# Altium PCB JTAG_XILINX.PcbDoc (part 2 of 2)
Units mm, origin at the board's own origin, x right, y up, seen from the top; angles counter-clockwise.
Board outline 27.94 x 27.94 mm, 4 copper layers (Top Layer, GND, PWR, Bottom Layer), stack 0.603 mm thick; 44 components, 49 nets, 1237 pads, 94 vias.
Unrouted connection lines stored in the file: 218.
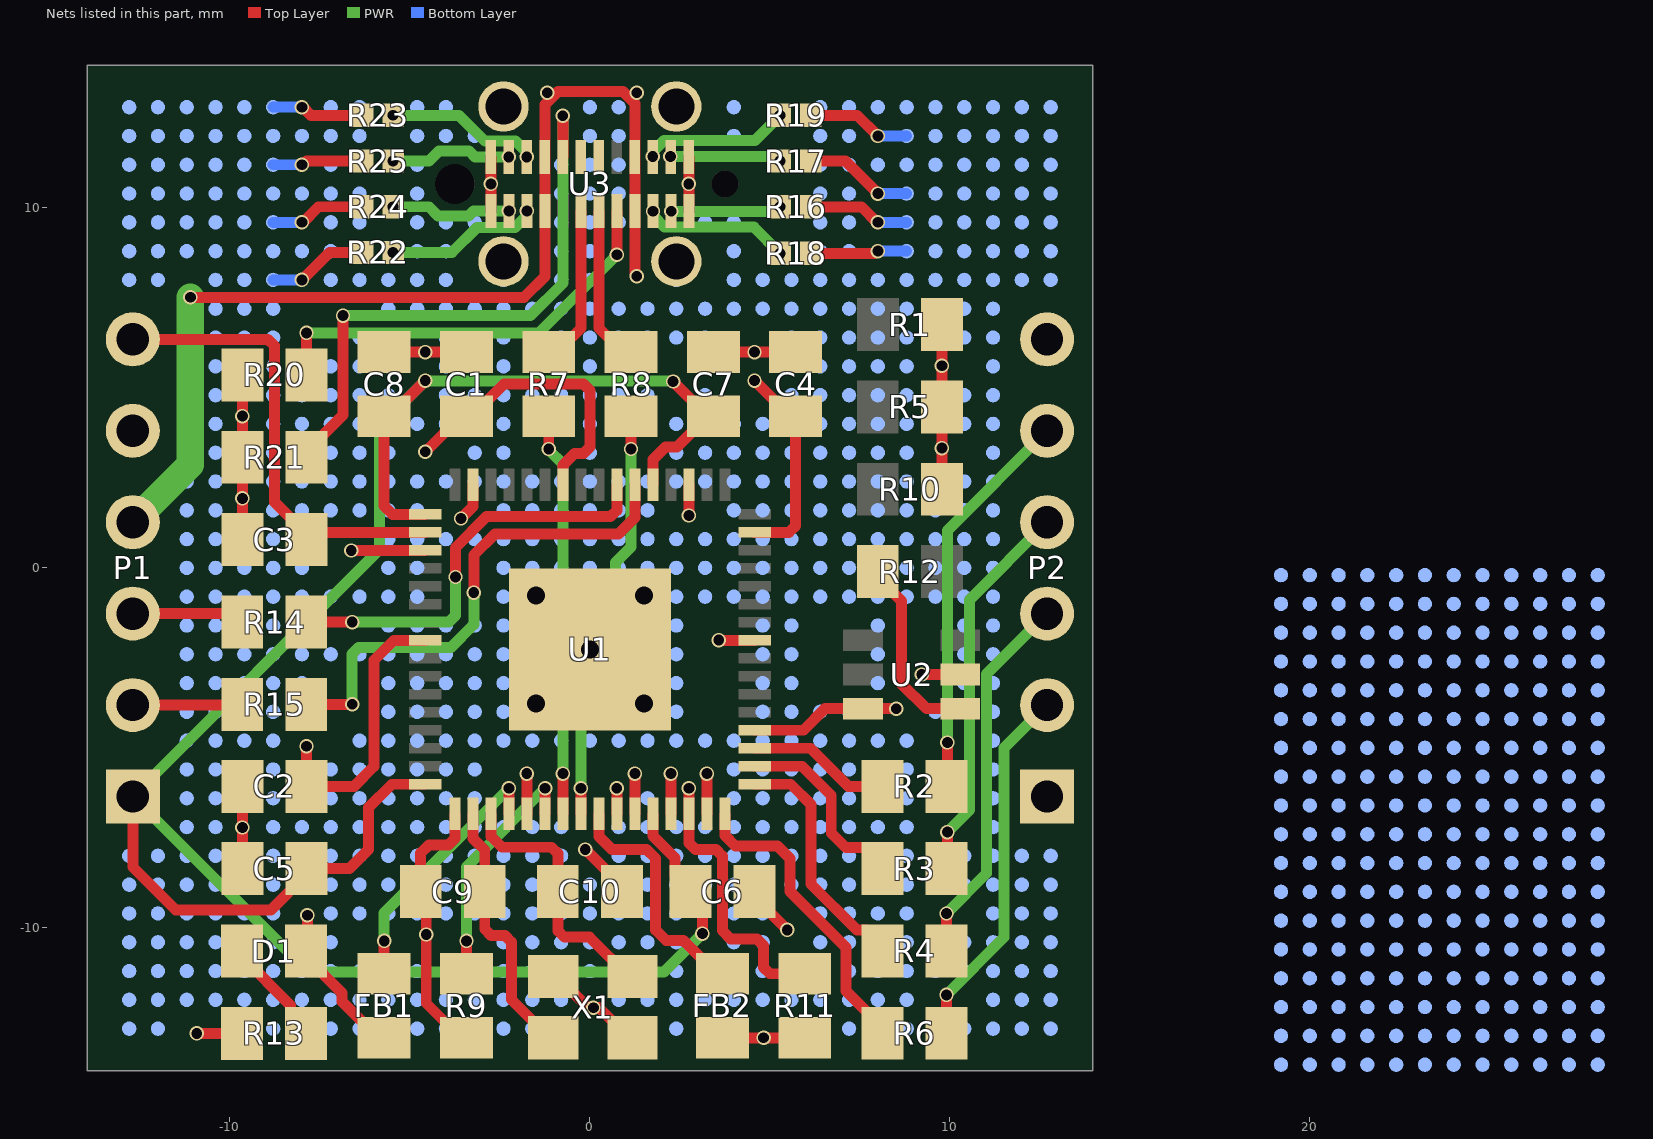
[diagram p4: the nets of this part, all layers, seen from the top]

## Via types
v1: diameter 0.4, hole 0.3, Top Layer to Bottom Layer, 89 vias
v2: diameter 0.7, hole 0.5, Top Layer to Bottom Layer, 5 vias

## Nets (pads, with @x,y where several pads share a name; then routed paths per layer and width w, separated by ;. In a path a pad name is that pad's centre, name@x,y a point inside that pad or via, vN(x,y) a via of type N, cw(c..) or ccw(c..) an arc to the next point about the centre after c; other vN are vias at no path point) (continued)
GND: C1.1 C2.1 C3.1 C4.1 C5.1 C6.1 C7.1 C8.1 C9.1 C10.1 P1.5 P2.1 pad.2@0,0 pad.2@0,0.8 pad.2@0,1.6 pad.2@0,2.4 pad.2@0,3.2 pad.2@0,4 pad.2@0,4.8 pad.2@0,5.6 pad.2@0,6.4 pad.2@0,7.2 pad.2@0,-0.8 pad.2@0,-1.6 pad.2@0,-2.261 pad.2@0,-3.2 pad.2@0,-4 pad.2@0,-4.8 pad.2@0,-8.8 pad.2@0,-9.6 pad.2@0,-10.4 pad.2@0,-11.2 pad.2@0.8,0 pad.2@0.8,0.8 pad.2@0.8,1.6 pad.2@0.8,2.4 pad.2@0.8,4 pad.2@0.8,4.8 pad.2@0.8,5.6 pad.2@0.8,6.4 pad.2@0.8,7.2 pad.2@0.8,-0.8 pad.2@0.8,-1.6 pad.2@0.8,-2.4 pad.2@0.8,-3.2 pad.2@0.8,-4 pad.2@0.8,-4.8 pad.2@0.8,-7.2 pad.2@0.8,-8 pad.2@0.8,-8.8 pad.2@0.8,-9.6 pad.2@0.8,-10.4 pad.2@0.8,-11.2 pad.2@0.8,-12 pad.2@0.8,-12.8 pad.2@1.6,0 pad.2@1.6,0.8 pad.2@1.6,1.6 pad.2@1.6,2.4 pad.2@1.6,4 pad.2@1.6,4.8 pad.2@1.6,5.6 pad.2@1.6,6.4 pad.2@1.6,7.2 pad.2@1.6,-0.8 pad.2@1.6,-1.6 pad.2@1.6,-2.4 pad.2@1.6,-4.8 pad.2@1.6,-6.4 pad.2@1.6,-7.2 pad.2@1.6,-8 pad.2@1.6,-8.8 pad.2@1.6,-9.6 pad.2@1.6,-10.4 pad.2@1.6,-11.2 pad.2@1.6,-12 pad.2@1.6,-12.8 pad.2@2.4,0 pad.2@2.4,0.8 pad.2@2.4,2.4 pad.2@2.4,3.2 pad.2@2.4,4 pad.2@2.4,6.4 pad.2@2.4,7.2 pad.2@2.4,8 pad.2@2.4,8.8 pad.2@2.4,-0.8 pad.2@2.4,-1.6 pad.2@2.4,-2.4 pad.2@2.4,-3.2 pad.2@2.4,-4 pad.2@2.4,-4.8 pad.2@2.4,-7.2 pad.2@2.4,-8 pad.2@2.4,-8.8 pad.2@2.4,-9.6 pad.2@2.4,-10.4 pad.2@2.4,-11.2 pad.2@2.4,-12 pad.2@2.4,-12.8 pad.2@3.2,0 pad.2@3.2,0.8 pad.2@3.2,2.4 pad.2@3.2,3.2 pad.2@3.2,4 pad.2@3.2,4.8 pad.2@3.2,5.6 pad.2@3.2,6.4 pad.2@3.2,7.2 pad.2@3.2,9.6 pad.2@3.2,-0.8 pad.2@3.2,-4.8 pad.2@3.2,-7.2 pad.2@3.2,-8 pad.2@3.2,-8.8 pad.2@3.2,-11.2 pad.2@3.2,-12 pad.2@3.2,-12.8 pad.2@4,0 pad.2@4,0.8 pad.2@4,1.6 pad.2@4,2.4 pad.2@4,3.2 pad.2@4,4 pad.2@4,7.2 pad.2@4,8 pad.2@4,8.8 pad.2@4,9.6 pad.2@4,12 pad.2@4,12.8 pad.2@4,-0.8 pad.2@4,-4.8 pad.2@4,-5.6 pad.2@4,-6.4 pad.2@4,-7.2 pad.2@4,-8 pad.2@4,-8.8 pad.2@4,-9.6 pad.2@4,-10.4 pad.2@4,-11.2 pad.2@4,-12 pad.2@4,-12.8 pad.2@4.8,0 pad.2@4.8,0.8 pad.2@4.8,1.6 pad.2@4.8,2.4 pad.2@4.8,3.2 pad.2@4.8,4 pad.2@4.8,7.2 pad.2@4.8,8 pad.2@4.8,-0.8 pad.2@4.8,-1.6 pad.2@4.8,-2.4 pad.2@4.8,-3.2 pad.2@4.8,-4 pad.2@4.8,-4.8 pad.2@4.8,-5.6 pad.2@4.8,-6.4 pad.2@4.8,-7.2 pad.2@4.8,-8 pad.2@4.8,-8.8 pad.2@4.8,-9.6 pad.2@4.8,-10.4 pad.2@4.8,-11.2 pad.2@4.8,-12 pad.2@5.6,0 pad.2@5.6,0.8 pad.2@5.6,1.6 pad.2@5.6,2.4 pad.2@5.6,3.2 pad.2@5.6,4 pad.2@5.6,4.8 pad.2@5.6,5.6 pad.2@5.6,6.4 pad.2@5.6,7.2 pad.2@5.6,8 pad.2@5.6,-0.8 pad.2@5.6,-1.6 pad.2@5.6,-2.4 pad.2@5.6,-3.2 pad.2@5.6,-4 pad.2@5.6,-4.8 pad.2@5.6,-5.6 pad.2@5.6,-6.4 pad.2@5.6,-7.2 pad.2@5.6,-8 pad.2@5.6,-8.8 pad.2@5.6,-11.2 pad.2@5.6,-12 pad.2@5.6,-12.8 pad.2@6.4,0 pad.2@6.4,0.8 pad.2@6.4,1.6 pad.2@6.4,2.4 pad.2@6.4,3.2 pad.2@6.4,4 pad.2@6.4,4.8 pad.2@6.4,5.6 pad.2@6.4,6.4 pad.2@6.4,7.2 pad.2@6.4,8 pad.2@6.4,8.8 pad.2@6.4,9.6 pad.2@6.4,10.4 pad.2@6.4,11.2 pad.2@6.4,12 pad.2@6.4,12.8 pad.2@6.4,-0.8 pad.2@6.4,-4 pad.2@6.4,-4.8 pad.2@6.4,-5.6 pad.2@6.4,-6.4 pad.2@6.4,-7.2 pad.2@6.4,-8 pad.2@6.4,-8.8 pad.2@6.4,-9.6 pad.2@6.4,-10.4 pad.2@6.4,-11.2 pad.2@6.4,-12 pad.2@6.4,-12.8 pad.2@7.2,0 pad.2@7.2,0.8 pad.2@7.2,1.6 pad.2@7.2,2.4 pad.2@7.2,3.2 pad.2@7.2,4 pad.2@7.2,4.8 pad.2@7.2,5.6 pad.2@7.2,6.4 pad.2@7.2,7.2 pad.2@7.2,8 pad.2@7.2,8.8 pad.2@7.2,9.6 pad.2@7.2,10.4 pad.2@7.2,11.2 pad.2@7.2,12 pad.2@7.2,12.8 pad.2@7.2,-0.8 pad.2@7.2,-4 pad.2@7.2,-4.8 pad.2@7.2,-5.6 pad.2@7.2,-6.4 pad.2@7.2,-7.2 pad.2@7.2,-8 pad.2@7.2,-8.8 pad.2@7.2,-9.6 pad.2@7.2,-10.4 pad.2@7.2,-11.2 pad.2@7.2,-12 pad.2@7.2,-12.8 pad.2@8,0 pad.2@8,0.8 pad.2@8,1.6 pad.2@8,2.4 pad.2@8,3.2 pad.2@8,4 pad.2@8,4.8 pad.2@8,5.6 pad.2@8,6.4 pad.2@8,7.2 pad.2@8,8 pad.2@8,11.2 pad.2@8,12.8 pad.2@8,-0.8 pad.2@8,-1.6 pad.2@8,-2.4 pad.2@8,-3.2 pad.2@8,-4.8 pad.2@8,-5.6 pad.2@8,-6.4 pad.2@8,-7.2 pad.2@8,-8 pad.2@8,-8.8 pad.2@8,-9.6 pad.2@8,-10.4 pad.2@8,-11.2 pad.2@8,-12 pad.2@8,-12.8 pad.2@8.8,0 pad.2@8.8,0.8 pad.2@8.8,1.6 pad.2@8.8,2.4 pad.2@8.8,3.2 pad.2@8.8,4 pad.2@8.8,4.8 pad.2@8.8,5.6 pad.2@8.8,8 pad.2@8.8,11.2 pad.2@8.8,12.8 pad.2@8.8,-0.8 pad.2@8.8,-4.8 pad.2@8.8,-5.6 pad.2@8.8,-6.4 pad.2@8.8,-7.2 pad.2@8.8,-8 pad.2@8.8,-8.8 pad.2@8.8,-9.6 pad.2@8.8,-10.4 pad.2@8.8,-11.2 pad.2@8.8,-12 pad.2@8.8,-12.8 pad.2@9.6,0 pad.2@9.6,2.4 pad.2@9.6,8 pad.2@9.6,8.8 pad.2@9.6,9.6 pad.2@9.6,10.4 pad.2@9.6,11.2 pad.2@9.6,12 pad.2@9.6,12.8 pad.2@9.6,-0.8 pad.2@9.6,-4 pad.2@9.6,-5.6 pad.2@9.6,-6.4 pad.2@9.6,-8 pad.2@9.6,-8.8 pad.2@9.6,-10.4 pad.2@9.6,-11.2 pad.2@9.6,-12.8 pad.2@10.4,0 pad.2@10.4,2.4 pad.2@10.4,8 pad.2@10.4,8.8 pad.2@10.4,9.6 pad.2@10.4,10.4 pad.2@10.4,11.2 pad.2@10.4,12 pad.2@10.4,12.8 pad.2@10.4,-5.6 pad.2@10.4,-6.4 pad.2@10.4,-8 pad.2@10.4,-8.8 pad.2@10.4,-10.4 pad.2@10.4,-11.2 pad.2@10.4,-12.8 pad.2@11.2,0 pad.2@11.2,2.4 pad.2@11.2,3.2 pad.2@11.2,5.6 pad.2@11.2,8 pad.2@11.2,8.8 pad.2@11.2,9.6 pad.2@11.2,10.4 pad.2@11.2,11.2 pad.2@11.2,12 pad.2@11.2,12.8 pad.2@11.2,-4.8 pad.2@11.2,-5.6 pad.2@11.2,-6.4 pad.2@11.2,-7.2 pad.2@11.2,-8 pad.2@11.2,-8.8 pad.2@11.2,-9.6 pad.2@11.2,-10.4 pad.2@11.2,-11.2 pad.2@11.2,-12 pad.2@11.2,-12.8 pad.2@12,8 pad.2@12,8.8 pad.2@12,9.6 pad.2@12,10.4 pad.2@12,11.2 pad.2@12,12 pad.2@12,12.8 pad.2@12,-8 pad.2@12,-8.8 pad.2@12,-9.6 pad.2@12,-10.4 pad.2@12,-11.2 pad.2@12,-12 pad.2@12,-12.8 pad.2@12.8,8 pad.2@12.8,8.8 pad.2@12.8,9.6 pad.2@12.8,10.4 pad.2@12.8,11.2 pad.2@12.8,12 pad.2@12.8,12.8 pad.2@12.8,-8 pad.2@12.8,-8.8 pad.2@12.8,-9.6 pad.2@12.8,-10.4 pad.2@12.8,-11.2 pad.2@12.8,-12 pad.2@12.8,-12.8 pad.2@19.2,-0.2 pad.2@19.2,-1 pad.2@19.2,-1.8 pad.2@19.2,-2.6 pad.2@19.2,-3.4 pad.2@19.2,-4.2 pad.2@19.2,-5 pad.2@19.2,-5.8 pad.2@19.2,-6.6 pad.2@19.2,-7.4 pad.2@19.2,-8.2 pad.2@19.2,-9 pad.2@19.2,-9.8 pad.2@19.2,-10.6 pad.2@19.2,-11.4 pad.2@19.2,-12.2 pad.2@19.2,-13 pad.2@19.2,-13.8 pad.2@20,-0.2 pad.2@20,-1 pad.2@20,-1.8 pad.2@20,-2.6 pad.2@20,-3.4 pad.2@20,-4.2 pad.2@20,-5 pad.2@20,-5.8 pad.2@20,-6.6 pad.2@20,-7.4 pad.2@20,-8.2 pad.2@20,-9 pad.2@20,-9.8 pad.2@20,-10.6 pad.2@20,-11.4 pad.2@20,-12.2 pad.2@20,-13 pad.2@20,-13.8 pad.2@20.8,-0.2 pad.2@20.8,-1 pad.2@20.8,-1.8 pad.2@20.8,-2.6 pad.2@20.8,-3.4 pad.2@20.8,-4.2 pad.2@20.8,-5 pad.2@20.8,-5.8 pad.2@20.8,-6.6 pad.2@20.8,-7.4 pad.2@20.8,-8.2 pad.2@20.8,-9 pad.2@20.8,-9.8 pad.2@20.8,-10.6 pad.2@20.8,-11.4 pad.2@20.8,-12.2 pad.2@20.8,-13 pad.2@20.8,-13.8 pad.2@21.6,-0.2 pad.2@21.6,-1 pad.2@21.6,-1.8 pad.2@21.6,-2.6 pad.2@21.6,-3.4 pad.2@21.6,-4.2 pad.2@21.6,-5 pad.2@21.6,-5.8 pad.2@21.6,-6.6 pad.2@21.6,-7.4 pad.2@21.6,-8.2 pad.2@21.6,-9 pad.2@21.6,-9.8 pad.2@21.6,-10.6 pad.2@21.6,-11.4 pad.2@21.6,-12.2 pad.2@21.6,-13 pad.2@21.6,-13.8 pad.2@22.4,-0.2 pad.2@22.4,-1 pad.2@22.4,-1.8 pad.2@22.4,-2.6 pad.2@22.4,-3.4 pad.2@22.4,-4.2 pad.2@22.4,-5 pad.2@22.4,-5.8 pad.2@22.4,-6.6 pad.2@22.4,-7.4 pad.2@22.4,-8.2 pad.2@22.4,-9 pad.2@22.4,-9.8 pad.2@22.4,-10.6 pad.2@22.4,-11.4 pad.2@22.4,-12.2 pad.2@22.4,-13 pad.2@22.4,-13.8 pad.2@23.2,-0.2 pad.2@23.2,-1 pad.2@23.2,-1.8 pad.2@23.2,-2.6 pad.2@23.2,-3.4 pad.2@23.2,-4.2 pad.2@23.2,-5 pad.2@23.2,-5.8 pad.2@23.2,-6.6 pad.2@23.2,-7.4 pad.2@23.2,-8.2 pad.2@23.2,-9 pad.2@23.2,-9.8 pad.2@23.2,-10.6 pad.2@23.2,-11.4 pad.2@23.2,-12.2 pad.2@23.2,-13 pad.2@23.2,-13.8 pad.2@24,-0.2 pad.2@24,-1 pad.2@24,-1.8 pad.2@24,-2.6 pad.2@24,-3.4 pad.2@24,-4.2 pad.2@24,-5 pad.2@24,-5.8 pad.2@24,-6.6 pad.2@24,-7.4 pad.2@24,-8.2 pad.2@24,-9 pad.2@24,-9.8 pad.2@24,-10.6 pad.2@24,-11.4 pad.2@24,-12.2 pad.2@24,-13 pad.2@24,-13.8 pad.2@24.8,-0.2 pad.2@24.8,-1 pad.2@24.8,-1.8 pad.2@24.8,-2.6 pad.2@24.8,-3.4 pad.2@24.8,-4.2 pad.2@24.8,-5 pad.2@24.8,-5.8 pad.2@24.8,-6.6 pad.2@24.8,-7.4 pad.2@24.8,-8.2 pad.2@24.8,-9 pad.2@24.8,-9.8 pad.2@24.8,-10.6 pad.2@24.8,-11.4 pad.2@24.8,-12.2 pad.2@24.8,-13 pad.2@24.8,-13.8 pad.2@25.6,-0.2 pad.2@25.6,-1 pad.2@25.6,-1.8 pad.2@25.6,-2.6 pad.2@25.6,-3.4 pad.2@25.6,-4.2 pad.2@25.6,-5 pad.2@25.6,-5.8 pad.2@25.6,-6.6 pad.2@25.6,-7.4 pad.2@25.6,-8.2 pad.2@25.6,-9 pad.2@25.6,-9.8 pad.2@25.6,-10.6 pad.2@25.6,-11.4 pad.2@25.6,-12.2 pad.2@25.6,-13 pad.2@25.6,-13.8 pad.2@26.4,-0.2 pad.2@26.4,-1 pad.2@26.4,-1.8 pad.2@26.4,-2.6 pad.2@26.4,-3.4 pad.2@26.4,-4.2 pad.2@26.4,-5 pad.2@26.4,-5.8 pad.2@26.4,-6.6 pad.2@26.4,-7.4 pad.2@26.4,-8.2 pad.2@26.4,-9 pad.2@26.4,-9.8 pad.2@26.4,-10.6 pad.2@26.4,-11.4 pad.2@26.4,-12.2 pad.2@26.4,-13 pad.2@26.4,-13.8 pad.2@27.2,-0.2 pad.2@27.2,-1 pad.2@27.2,-1.8 pad.2@27.2,-2.6 pad.2@27.2,-3.4 pad.2@27.2,-4.2 pad.2@27.2,-5 pad.2@27.2,-5.8 pad.2@27.2,-6.6 pad.2@27.2,-7.4 pad.2@27.2,-8.2 pad.2@27.2,-9 pad.2@27.2,-9.8 pad.2@27.2,-10.6 pad.2@27.2,-11.4 pad.2@27.2,-12.2 pad.2@27.2,-13 pad.2@27.2,-13.8 pad.2@28,-0.2 pad.2@28,-1 pad.2@28,-1.8 pad.2@28,-2.6 pad.2@28,-3.4 pad.2@28,-4.2 pad.2@28,-5 pad.2@28,-5.8 pad.2@28,-6.6 pad.2@28,-7.4 pad.2@28,-8.2 pad.2@28,-9 pad.2@28,-9.8 pad.2@28,-10.6 pad.2@28,-11.4 pad.2@28,-12.2 pad.2@28,-13 pad.2@28,-13.8 pad.2@-0.8,0 pad.2@-0.8,0.8 pad.2@-0.8,1.6 pad.2@-0.8,2.4 pad.2@-0.8,4 pad.2@-0.8,4.8 pad.2@-0.8,5.6 pad.2@-0.8,6.4 pad.2@-0.8,7.2 pad.2@-0.8,-0.8 pad.2@-0.8,-1.6 pad.2@-0.8,-2.4 pad.2@-0.8,-3.2 pad.2@-0.8,-4 pad.2@-0.8,-4.8 pad.2@-0.8,-7.2 pad.2@-0.8,-8 pad.2@-0.8,-8.8 pad.2@-0.8,-9.6 pad.2@-0.8,-10.4 pad.2@-0.8,-11.2 pad.2@-0.8,-12 pad.2@-0.8,-12.8 pad.2@-1.6,0 pad.2@-1.6,0.8 pad.2@-1.6,1.6 pad.2@-1.6,2.4 pad.2@-1.6,4 pad.2@-1.6,4.8 pad.2@-1.6,5.6 pad.2@-1.6,6.4 pad.2@-1.6,7.2 pad.2@-1.6,-0.8 pad.2@-1.6,-1.6 pad.2@-1.6,-2.4 pad.2@-1.6,-4.8 pad.2@-1.6,-7.2 pad.2@-1.6,-8 pad.2@-1.6,-8.8 pad.2@-1.6,-9.6 pad.2@-1.6,-10.4 pad.2@-1.6,-11.2 pad.2@-1.6,-12 pad.2@-1.6,-12.8 pad.2@-2.4,0 pad.2@-2.4,0.8 pad.2@-2.4,1.6 pad.2@-2.4,2.4 pad.2@-2.4,3.2 pad.2@-2.4,4 pad.2@-2.4,4.8 pad.2@-2.4,5.6 pad.2@-2.4,6.4 pad.2@-2.4,7.2 pad.2@-2.4,8 pad.2@-2.4,8.8 pad.2@-2.4,-0.8 pad.2@-2.4,-1.6 pad.2@-2.4,-2.4 pad.2@-2.4,-3.2 pad.2@-2.4,-4 pad.2@-2.4,-4.8 pad.2@-2.4,-7.2 pad.2@-2.4,-8 pad.2@-2.4,-8.8 pad.2@-2.4,-9.6 pad.2@-2.4,-10.4 pad.2@-2.4,-11.2 pad.2@-2.4,-12 pad.2@-2.4,-12.8 pad.2@-3.2,0.8 pad.2@-3.2,2.4 pad.2@-3.2,3.2 pad.2@-3.2,4 pad.2@-3.2,4.8 pad.2@-3.2,5.6 pad.2@-3.2,6.4 pad.2@-3.2,7.2 pad.2@-3.2,9.6 pad.2@-3.2,12 pad.2@-3.2,-1.6 pad.2@-3.2,-2.4 pad.2@-3.2,-3.2 pad.2@-3.2,-4 pad.2@-3.2,-4.8 pad.2@-3.2,-5.6 pad.2@-3.2,-6.4 pad.2@-3.2,-7.2 pad.2@-3.2,-8 pad.2@-3.2,-8.8 pad.2@-3.2,-9.6 pad.2@-3.2,-11.2 pad.2@-3.2,-12 pad.2@-3.2,-12.8 pad.2@-4,0.8 pad.2@-4,2.4 pad.2@-4,4 pad.2@-4,4.8 pad.2@-4,5.6 pad.2@-4,6.4 pad.2@-4,7.2 pad.2@-4,8 pad.2@-4,8.8 pad.2@-4,9.6 pad.2@-4,12 pad.2@-4,12.8 pad.2@-4,-1.6 pad.2@-4,-2.4 pad.2@-4,-3.2 pad.2@-4,-4 pad.2@-4,-4.8 pad.2@-4,-5.6 pad.2@-4,-6.4 pad.2@-4,-7.2 pad.2@-4,-8 pad.2@-4,-8.8 pad.2@-4,-9.6 pad.2@-4,-11.2 pad.2@-4,-12 pad.2@-4,-12.8 pad.2@-4.8,0 pad.2@-4.8,0.8 pad.2@-4.8,1.6 pad.2@-4.8,2.4 pad.2@-4.8,4 pad.2@-4.8,7.2 pad.2@-4.8,8 pad.2@-4.8,8.8 pad.2@-4.8,9.6 pad.2@-4.8,10.4 pad.2@-4.8,11.2 pad.2@-4.8,12 pad.2@-4.8,12.8 pad.2@-4.8,-0.8 pad.2@-4.8,-1.6 pad.2@-4.8,-2.4 pad.2@-4.8,-3.2 pad.2@-4.8,-4 pad.2@-4.8,-4.8 pad.2@-4.8,-5.6 pad.2@-4.8,-6.4 pad.2@-4.8,-7.2 pad.2@-4.8,-8 pad.2@-4.8,-8.8 pad.2@-4.8,-9.6 pad.2@-4.8,-11.2 pad.2@-4.8,-12 pad.2@-4.8,-12.8 pad.2@-5.6,0 pad.2@-5.6,0.8 pad.2@-5.6,1.6 pad.2@-5.6,2.4 pad.2@-5.6,3.2 pad.2@-5.6,4 pad.2@-5.6,4.8 pad.2@-5.6,5.6 pad.2@-5.6,6.4 pad.2@-5.6,7.2 pad.2@-5.6,8 pad.2@-5.6,-0.8 pad.2@-5.6,-1.6 pad.2@-5.6,-2.4 pad.2@-5.6,-3.2 pad.2@-5.6,-4 pad.2@-5.6,-4.8 pad.2@-5.6,-5.6 pad.2@-5.6,-6.4 pad.2@-5.6,-7.2 pad.2@-5.6,-8 pad.2@-5.6,-8.8 pad.2@-5.6,-9.6 pad.2@-5.6,-11.2 pad.2@-5.6,-12 pad.2@-5.6,-12.8 pad.2@-6.4,1.6 pad.2@-6.4,2.4 pad.2@-6.4,3.2 pad.2@-6.4,4 pad.2@-6.4,4.8 pad.2@-6.4,5.6 pad.2@-6.4,6.4 pad.2@-6.4,8 pad.2@-6.4,8.8 pad.2@-6.4,9.6 pad.2@-6.4,10.4 pad.2@-6.4,11.2 pad.2@-6.4,12 pad.2@-6.4,12.8 pad.2@-6.4,-0.8 pad.2@-6.4,-2.4 pad.2@-6.4,-4.8 pad.2@-6.4,-5.6 pad.2@-6.4,-6.4 pad.2@-6.4,-7.2 pad.2@-6.4,-8 pad.2@-6.4,-8.8 pad.2@-6.4,-9.6 pad.2@-6.4,-11.2 pad.2@-6.4,-12 pad.2@-6.4,-12.8 pad.2@-7.2,1.6 pad.2@-7.2,2.4 pad.2@-7.2,3.2 pad.2@-7.2,4 pad.2@-7.2,4.8 pad.2@-7.2,5.6 pad.2@-7.2,8 pad.2@-7.2,8.8 pad.2@-7.2,9.6 pad.2@-7.2,10.4 pad.2@-7.2,11.2 pad.2@-7.2,12 pad.2@-7.2,12.8 pad.2@-7.2,-0.8 pad.2@-7.2,-2.4 pad.2@-7.2,-5.6 pad.2@-7.2,-6.4 pad.2@-7.2,-7.2 pad.2@-7.2,-8 pad.2@-7.2,-8.8 pad.2@-7.2,-9.6 pad.2@-7.2,-10.4 pad.2@-7.2,-11.2 pad.2@-7.2,-12 pad.2@-7.2,-12.8 pad.2@-8,0 pad.2@-8,0.8 pad.2@-8,1.6 pad.2@-8,2.4 pad.2@-8,3.2 pad.2@-8,4 pad.2@-8,4.8 pad.2@-8,5.6 pad.2@-8,8.8 pad.2@-8,10.4 pad.2@-8,12 pad.2@-8,-0.8 pad.2@-8,-1.6 pad.2@-8,-2.4 pad.2@-8,-3.2 pad.2@-8,-4 pad.2@-8,-6.4 pad.2@-8,-7.2 pad.2@-8,-8 pad.2@-8,-8.8 pad.2@-8,-10.4 pad.2@-8,-11.2 pad.2@-8,-12 pad.2@-8,-12.8 pad.2@-8.8,0 pad.2@-8.8,0.8 pad.2@-8.8,1.6 pad.2@-8.8,2.4 pad.2@-8.8,3.2 pad.2@-8.8,4 pad.2@-8.8,4.8 pad.2@-8.8,7.2 pad.2@-8.8,8.8 pad.2@-8.8,10.4 pad.2@-8.8,12 pad.2@-8.8,-0.8 pad.2@-8.8,-1.6 pad.2@-8.8,-2.4 pad.2@-8.8,-3.2 pad.2@-8.8,-4 pad.2@-8.8,-4.8 pad.2@-8.8,-5.6 pad.2@-8.8,-6.4 pad.2@-8.8,-7.2 pad.2@-8.8,-8 pad.2@-8.8,-8.8 pad.2@-8.8,-9.6 pad.2@-8.8,-10.4 pad.2@-8.8,-11.2 pad.2@-8.8,-12 pad.2@-8.8,-12.8 pad.2@-9.6,0 pad.2@-9.6,0.8 pad.2@-9.6,3.2 pad.2@-9.6,7.2 pad.2@-9.6,8 pad.2@-9.6,8.8 pad.2@-9.6,9.6 pad.2@-9.6,10.4 pad.2@-9.6,11.2 pad.2@-9.6,12 pad.2@-9.6,12.8 pad.2@-9.6,-2.4 pad.2@-9.6,-4.8 pad.2@-9.6,-8 pad.2@-9.6,-8.8 pad.2@-9.6,-9.6 pad.2@-9.6,-10.4 pad.2@-9.6,-11.2 pad.2@-9.6,-12 pad.2@-9.6,-12.8 pad.2@-10.4,0 pad.2@-10.4,0.8 pad.2@-10.4,1.6 pad.2@-10.4,2.4 pad.2@-10.4,3.2 pad.2@-10.4,4 pad.2@-10.4,4.8 pad.2@-10.4,7.2 pad.2@-10.4,8 pad.2@-10.4,8.8 pad.2@-10.4,9.6 pad.2@-10.4,10.4 pad.2@-10.4,11.2 pad.2@-10.4,12 pad.2@-10.4,12.8 pad.2@-10.4,-2.4 pad.2@-10.4,-4.8 pad.2@-10.4,-7.2 pad.2@-10.4,-8 pad.2@-10.4,-8.8 pad.2@-10.4,-9.6 pad.2@-10.4,-10.4 pad.2@-10.4,-11.2 pad.2@-10.4,-12 pad.2@-11.2,0 pad.2@-11.2,0.8 pad.2@-11.2,1.6 pad.2@-11.2,2.4 pad.2@-11.2,3.2 pad.2@-11.2,4 pad.2@-11.2,4.8 pad.2@-11.2,8.8 pad.2@-11.2,9.6 pad.2@-11.2,10.4 pad.2@-11.2,11.2 pad.2@-11.2,12 pad.2@-11.2,12.8 pad.2@-11.2,-2.4 pad.2@-11.2,-4.8 pad.2@-11.2,-7.2 pad.2@-11.2,-8 pad.2@-11.2,-8.8 pad.2@-11.2,-9.6 pad.2@-11.2,-10.4 pad.2@-11.2,-11.2 pad.2@-11.2,-12 pad.2@-12,8 pad.2@-12,8.8 pad.2@-12,9.6 pad.2@-12,10.4 pad.2@-12,11.2 pad.2@-12,12 pad.2@-12,12.8 pad.2@-12,-8 pad.2@-12,-8.8 pad.2@-12,-9.6 pad.2@-12,-10.4 pad.2@-12,-11.2 pad.2@-12,-12 pad.2@-12,-12.8 pad.2@-12.8,8 pad.2@-12.8,8.8 pad.2@-12.8,9.6 pad.2@-12.8,10.4 pad.2@-12.8,11.2 pad.2@-12.8,12 pad.2@-12.8,12.8 pad.2@-12.8,-8 pad.2@-12.8,-8.8 pad.2@-12.8,-9.6 pad.2@-12.8,-10.4 pad.2@-12.8,-11.2 pad.2@-12.8,-12 pad.2@-12.8,-12.8 R9.1 R13.1 R20.1 R21.2 U1.1 U1.5 U1.10 U1.11 U1.13 U1.15 U1.25 U1.35 U1.47 U1.51 U1.65 U2.2 U3.25 U3.26 U3.27 U3.28 U3.A1 U3.A12 U3.B1 U3.B12 X1.2 X1.4 | length 40.5
  Top Layer w0.305: v1(-10.922,-12.931) R13.1@-9.668,-12.931 ; C5.1@-9.653,-8.357 v1(-9.653,-7.214) C2.1@-9.653,-6.071 ; C3.1@-9.653,0.787 v1(-9.653,1.93) -9.653,3.072 R21.2@-9.654,3.073 -9.653,3.074 v1(-9.653,4.217) R20.1@-9.653,5.359 ; v1(-6.629,0.483) -6.625,0.487 -4.578,0.487 U1.51@-4.575,0.489 ; C8.1@-5.715,5.995 v1(-4.572,5.995) C1.1@-3.429,5.995 ; U1.1@-3.75,-6.836 -3.75,-7.518 -3.929,-7.696 -4.47,-7.696 -4.701,-7.927 C9.1@-4.701,-8.992 -4.547,-9.146 v1(-4.547,-10.185) -4.547,-12.094 -3.584,-13.057 R9.1@-3.429,-13.057 ; v1(-3.581,1.372) -3.253,1.7 -3.253,2.312 U1.47@-3.25,2.314 ; U3.B1@-2.752,11.42 -2.751,11.419 U3.A12@-2.75,9.918 U3.A12@-2.75,9.918 ; v1@-1.753,-5.666 -1.75,-5.668 U1.5@-1.75,-6.836 ; X1.4@-1.016,-11.354 -0.916,-11.354 -0.052,-12.217 v1(0.097,-12.217) 0.246,-12.217 1.084,-13.056 X1.2@1.184,-13.056 ; v1@-0.125,-7.821 0.89,-8.837 C10.1@0.89,-8.992 ; v1(0.747,-6.121) 0.747,-6.833 U1.10@0.75,-6.836 ; U1.11@1.25,-6.836 v1(1.25,-5.715) ; U1.13@2.25,-6.836 v1@2.25,-5.731 ; U3.B12@2.748,11.42 U3.B12@2.748,11.42 2.749,9.919 U3.A1@2.75,9.918 ; v1(2.75,1.454) U1.35@2.75,2.314 ; U1.15@3.25,-6.836 3.25,-5.717 v1@3.251,-5.715 ; C7.1@3.429,5.996 3.43,5.995 v1(4.573,5.995) C4.1@5.715,5.995 ; v1(3.581,-2.007) 3.585,-2.011 U1.25@4.575,-2.011 ; C6.1@4.573,-8.992 4.573,-9.147 v1(5.485,-10.058) ; v1(9.22,-2.962) U2.2@10.287,-2.962
  other v1: -0.127,-7.823 -1.753,-5.715 2.25,-5.715 3.25,-5.715 -2.751,10.669 2.749,10.669
  other v2: -1.5,-3.761 1.5,-3.761 0,-2.261 -1.5,-0.761 1.5,-0.761
JTAG_RXD: P1.3 pad.2@-9.6,-0.8 pad.2@-9.6,-1.6 pad.2@-10.4,-0.8 pad.2@-10.4,-1.6 pad.2@-11.2,-0.8 pad.2@-11.2,-1.6 R14.2 | length 3.1
  Top Layer w0.305: P1.3@-12.7,-1.27 -9.896,-1.27 R14.2@-9.661,-1.505
JTAG_TCK: P2.2 pad.2@10.4,-3.2 pad.2@10.4,-4 pad.2@11.2,-3.2 pad.2@11.2,-4 pad.2@12.8,-4 R6.2 | length 10.3
  Top Layer w0.305: v1(9.906,-11.862) 9.908,-11.864 R6.2@9.908,-12.929
  PWR w0.305: v1(9.906,-11.862) 11.506,-10.262 11.506,-5.004 P2.2@12.7,-3.81
JTAG_TDI: P2.3 pad.2@10.4,-0.8 pad.2@10.4,-1.6 pad.2@10.4,-2.4 pad.2@11.2,-0.8 pad.2@11.2,-1.6 pad.2@11.2,-2.4 pad.2@12.8,-0.8 pad.2@12.8,-1.6 R4.2 | length 10.5
  Top Layer w0.305: v1(9.906,-9.601) 9.908,-9.603 R4.2@9.908,-10.643
  PWR w0.305: v1(9.906,-9.601) 11.024,-8.484 11.024,-2.946 P2.3@12.7,-1.27
JTAG_TDO: P2.4 pad.2@9.6,0.8 pad.2@9.6,1.6 pad.2@10.4,0.8 pad.2@10.4,1.6 pad.2@11.2,0.8 pad.2@11.2,1.6 R3.2 | length 10.8
  Top Layer w0.305: R3.2@9.908,-8.357 9.931,-8.333 v1(9.931,-7.341)
  PWR w0.305: v1(9.931,-7.341) 10.541,-6.731 10.541,-0.889 P2.4@12.7,1.27
JTAG_TMS: P2.5 pad.2@9.6,4 pad.2@9.6,4.8 pad.2@10.4,4 pad.2@10.4,4.8 pad.2@11.2,4 pad.2@11.2,4.8 R2.2 | length 11
  Top Layer w0.305: R2.2@9.908,-6.071 9.931,-6.047 v1(9.931,-4.851)
  PWR w0.305: v1(9.931,-4.851) 9.931,1.041 P2.5@12.7,3.81
JTAG_TXD: P1.2 pad.2@-9.6,-3.2 pad.2@-9.6,-4 pad.2@-10.4,-3.2 pad.2@-10.4,-4 pad.2@-11.2,-3.2 pad.2@-11.2,-4 R15.2 | length 3.8
  Top Layer w0.305: P1.2@-12.7,-3.81 -9.68,-3.81 R15.2@-9.661,-3.791 -9.661,-3.636 R15.2@-10.089,-3.208
NetD1_K: D1.K R13.2 | length 3
  Top Layer w0.305: D1.K@-9.668,-10.645 -9.668,-10.8 -8.316,-12.153 -8.316,-12.504 R13.2@-7.888,-12.931
NetFB1_1: FB1.1 U1.4 | length 7.3
  Top Layer w0.305: FB1.1@-5.715,-11.277 v1(-5.715,-10.363) ; U1.4@-2.25,-6.836 v1(-2.25,-6.121)
  PWR w0.305: v1(-5.715,-10.363) -5.715,-9.586 v1(-2.25,-6.121)
NetFB2_1: FB2.1 U1.9 | length 6.8
  Top Layer w0.305: U1.9@0.25,-6.836 0.25,-7.463 0.61,-7.823 1.575,-7.823 1.829,-8.077 1.829,-10.058 2.121,-10.351 2.603,-10.351 3.2,-10.948 3.2,-10.973 3.503,-11.276 FB2.1@3.683,-11.276
NetR2_1: R2.1 U1.19 | length 4
  Top Layer w0.305: U1.19@4.575,-5.011 6.128,-5.011 7.188,-6.071 R2.1@8.128,-6.071
NetR3_1: R3.1 U1.18 | length 5.4
  Top Layer w0.305: U1.18@4.575,-5.511 5.892,-5.511 6.706,-6.325 6.706,-7.366 7.114,-7.774 7.7,-7.774 8.128,-8.202 R3.1@8.128,-8.357
NetR4_1: R4.1 U1.17 | length 6.9
  Top Layer w0.305: U1.17@4.575,-6.011 5.579,-6.011 6.147,-6.579 6.147,-8.788 7.418,-10.06 7.7,-10.06 8.128,-10.488 R4.1@8.128,-10.643
NetR6_1: R6.1 U1.16 | length 8.6
  Top Layer w0.305: U1.16@3.75,-6.836 3.75,-7.433 4.039,-7.722 5.207,-7.722 5.563,-8.077 5.563,-8.992 7.112,-10.541 7.112,-11.758 8.128,-12.774 R6.1@8.128,-12.929
NetR7_2: R7.2 U1.7 | length 11.2
  Top Layer w0.305: v1(-1.143,3.302) R7.2@-1.143,4.215 ; U1.7@-0.75,-6.836 v1(-0.75,-5.715)
  PWR w0.305: v1(-1.143,3.302) -1.143,3.276 -0.75,2.884 v1(-0.75,-5.715)
NetR8_2: R8.2 U1.8 | length 11.6
  Top Layer w0.305: U1.8@-0.25,-6.836 v1(-0.25,-6.121) ; v1(1.143,3.302) R8.2@1.143,4.215
  PWR w0.305: v1(-0.25,-6.121) -0.25,-3.501 0.711,-2.54 0.711,0.152 1.143,0.584 v1(1.143,3.302)
NetR9_2: R9.2 U1.6 | length 6.8
  Top Layer w0.305: R9.2@-3.429,-11.277 v1(-3.429,-10.363) ; U1.6@-1.25,-6.836 -1.248,-6.833 -1.248,-6.125 v1(-1.245,-6.121)
  PWR w0.305: v1(-3.429,-10.363) -3.429,-8.306 v1(-1.245,-6.121)
NetR11_2: R11.2 U1.14 | length 7.8
  Top Layer w0.305: v1(2.75,-6.121) U1.14@2.75,-6.836 2.75,-7.645 2.928,-7.823 3.5,-7.823 3.678,-8.002 3.678,-10.079 3.912,-10.312 4.647,-10.312 4.826,-10.491 4.826,-11.097 5.005,-11.276 R11.2@5.969,-11.276
NetR12_2: R12.2 U2.1 | length 5.3
  Top Layer w0.305: R12.2@8,-0.102 8,-0.257 8.661,-0.918 8.661,-3.226 9.347,-3.912 U2.1@10.287,-3.912
NetR14_1: R14.1 U1.39 | length 11.7
  Top Layer w0.305: R14.1@-7.881,-1.505 v1(-6.604,-1.505) ; v1(-3.734,-0.254) -3.734,0.559 -2.87,1.422 0.571,1.422 0.75,1.601 U1.39@0.75,2.314
  PWR w0.305: v1(-6.604,-1.505) -3.912,-1.505 -3.734,-1.326 v1(-3.734,-0.254)
NetR15_1: R15.1 U1.38 | length 14.1
  Top Layer w0.305: R15.1@-7.881,-3.791 v1(-6.604,-3.791) ; v1@-3.226,-0.66 -3.226,0.356 -2.635,0.947 0.794,0.947 1.25,1.402 U1.38@1.25,2.314
  PWR w0.305: v1(-6.604,-3.791) -6.604,-2.388 -6.425,-2.21 -3.861,-2.21 -3.226,-1.575 v1(-3.226,-0.686)
NetR16_2: R16.2 U3.A2 | length 3.1
  PWR w0.305: v1(2.261,9.906) 5.13,9.906 5.257,10.033 v1(5.283,10.033)
NetR17_1: R17.1 U3.B11 | length 3.1
  PWR w0.305: v1(2.235,11.43) 5.13,11.43 5.257,11.303 v1(5.283,11.303)
NetR18_2: R18.2 U3.A3 | length 4.1
  PWR w0.305: v1(1.753,9.906) 1.771,9.888 1.771,9.772 2.078,9.465 4.556,9.465 v1(5.283,8.738)
NetR19_1: R19.1 U3.B10 | length 4.1
  PWR w0.305: v1(1.746,11.43) 1.765,11.448 1.765,11.583 2.058,11.877 4.587,11.877 v1(5.283,12.573)
NetR20_2: R20.2 U3.A5 | length 11.9
  Top Layer w0.305: v1(-7.874,6.528) v1(-7.874,6.528) R20.2@-7.873,5.359 ; v1(0.75,8.699) U3.A5@0.75,9.918
  PWR w0.305: v1(-7.874,6.528) -1.421,6.528 v1(0.75,8.699)
NetR21_1: R21.1 U3.B5 | length 16.6
  Top Layer w0.305: R21.1@-7.874,3.073 -7.874,3.228 -6.858,4.244 v1(-6.858,7.01) ; U3.B5@-0.752,11.42 v1(-0.752,12.563)
  PWR w0.305: v1(-6.858,7.01) -1.651,7.01 -0.752,7.909 v1(-0.752,12.563)
NetR22_2: R22.2 U3.A10 | length 4.3
  PWR w0.305: v1(-5.468,8.763) -3.837,8.763 -3.141,9.459 -2.085,9.459 -1.768,9.776 -1.768,9.9 v1(-1.75,9.918)
NetR23_1: R23.1 U3.B3 | length 4.3
  PWR w0.305: v1(-5.468,12.573) -3.632,12.573 -2.92,11.861 -2.069,11.861 -1.77,11.562 -1.77,11.438 v1(-1.752,11.42)
NetR24_2: R24.2 U3.A11 | length 3.4
  PWR w0.305: v1(-5.468,10.033) -4.47,10.033 -4.216,9.779 -3.378,9.779 -3.239,9.918 v1(-2.25,9.918)
NetR25_1: R25.1 U3.B2 | length 3.4
  PWR w0.305: v1(-5.468,11.303) -4.47,11.303 -4.191,11.582 -3.353,11.582 -3.19,11.42 v1(-2.252,11.42)
OSCI: C9.2 U1.2 X1.1 | length 7.4
  Top Layer w0.305: U1.2@-3.25,-6.836 -3.248,-6.838 -3.248,-7.513 -2.921,-7.84 C9.2@-2.921,-8.992 -2.921,-10.032 -2.742,-10.211 -2.363,-10.211 -2.184,-10.389 -2.184,-11.987 -1.116,-13.056 X1.1@-1.016,-13.056
OSCO: C10.2 U1.3 X1.3 | length 7.4
  Top Layer w0.305: U1.3@-2.75,-6.836 -2.748,-6.838 -2.748,-7.456 -2.443,-7.761 -1.069,-7.761 -0.89,-7.939 C10.2@-0.89,-8.992 -0.89,-10.082 -0.711,-10.261 -0.009,-10.261 1.084,-11.354 X1.3@1.184,-11.354
RX1N: pad.2@8.8,12 R19.2 | length 2.9
  Top Layer w0.305: R19.2@6.14,12.573 7.427,12.573 v1(8,12)
  Bottom Layer w0.305: v1(8,12) pad.2@8.8,12
RX1P: pad.2@8.8,10.4 R17.2 | length 3
  Top Layer w0.305: R17.2@6.14,11.303 7.097,11.303 v1(8,10.4)
  Bottom Layer w0.305: v1(8,10.4) pad.2@8.8,10.4
RX2N: pad.2@-8.8,8 R22.1 | length 2.8
  Top Layer w0.305: v1(-8,8) -7.237,8.763 R22.1@-6.318,8.763
  Bottom Layer w0.305: pad.2@-8.8,8 v1(-8,8)
RX2P: pad.2@-8.8,9.6 R24.1 | length 2.7
  Top Layer w0.305: v1(-8,9.6) -7.974,9.6 -7.541,10.033 R24.1@-6.318,10.033
  Bottom Layer w0.305: pad.2@-8.8,9.6 v1(-8,9.6)
TX1N: pad.2@8.8,8.8 R18.1 | length 2.7
  Top Layer w0.305: R18.1@6.14,8.738 7.912,8.738 7.974,8.8 v1(8,8.8)
  Bottom Layer w0.305: v1(8,8.8) pad.2@8.8,8.8
TX1P: pad.2@8.8,9.6 R16.1 | length 2.8
  Top Layer w0.305: R16.1@6.14,10.033 7.541,10.033 7.974,9.6 v1(8,9.6)
  Bottom Layer w0.305: v1(8,9.6) pad.2@8.8,9.6
TX2N: pad.2@-8.8,12.8 R23.2 | length 2.6
  Top Layer w0.305: v1(-8,12.8) -7.974,12.8 -7.747,12.573 R23.2@-6.318,12.573
  Bottom Layer w0.305: pad.2@-8.8,12.8 v1(-8,12.8)
TX2P: pad.2@-8.8,11.2 R25.2 | length 2.5
  Top Layer w0.305: v1(-8,11.2) -7.974,11.2 -7.871,11.303 R25.2@-6.318,11.303
  Bottom Layer w0.305: pad.2@-8.8,11.2 v1(-8,11.2)
USB_D_n: R7.1 U3.A7 U3.B7 | length 4.4
  Top Layer w0.305: R7.1@-1.143,5.995 -0.715,6.423 -0.486,6.423 -0.25,6.659 U3.A7@-0.25,9.918
USB_D_p: R8.1 U3.A6 U3.B6 | length 4.4
  Top Layer w0.305: U3.A6@0.25,9.918 0.25,6.659 0.486,6.423 0.715,6.423 R8.1@1.143,5.995
VCC_1V8: C5.2 C6.2 C7.2 C8.2 P1.1 pad.2@-9.6,-5.6 pad.2@-9.6,-6.4 pad.2@-10.4,-5.6 pad.2@-10.4,-6.4 pad.2@-11.2,-5.6 pad.2@-11.2,-6.4 U1.12 U1.37 U1.49 U1.64 | length 66.4
  Top Layer w0.305: P1.1@-12.7,-6.35 -12.7,-8.306 -11.506,-9.5 -8.861,-9.5 -7.873,-8.512 C5.2@-7.873,-8.357 ; C5.2@-7.822,-8.078 -7.544,-8.357 -6.68,-8.357 -6.147,-7.823 -6.147,-6.655 -5.503,-6.011 U1.64@-4.575,-6.011 ; U1.49@-4.575,1.489 -5.483,1.489 -5.715,1.722 C8.2@-5.715,4.215 -5.56,4.215 v1(-4.572,5.203) ; U1.12@1.75,-6.836 1.752,-6.838 1.752,-7.444 2.365,-8.057 2.365,-8.564 C6.2@2.793,-8.992 3.124,-9.323 v1(3.124,-10.16) ; U1.37@1.75,2.314 1.752,2.317 1.752,3.006 2.104,3.358 2.415,3.358 C7.2@3.274,4.216 ; v1(2.311,5.179) C7.2@3.274,4.216 ; C7.2@3.429,4.216 C7.2@3.274,4.216
  PWR w0.305: v1(2.311,5.179) 2.299,5.191 -4.56,5.191 v1(-4.572,5.203) -5.842,3.933 -5.842,0.508 P1.1@-12.7,-6.35 -7.823,-11.227 2.057,-11.227 v1(3.124,-10.16)
VCC_3V3: C1.2 C2.2 C3.2 C4.2 D1.A FB1.2 FB2.2 P1.6 P2.6 pad.2@8.8,6.4 pad.2@8.8,7.2 pad.2@9.6,6.4 pad.2@9.6,7.2 pad.2@10.4,6.4 pad.2@10.4,7.2 pad.2@11.2,6.4 pad.2@11.2,7.2 pad.2@-8.8,5.6 pad.2@-8.8,6.4 pad.2@-9.6,5.6 pad.2@-9.6,6.4 pad.2@-10.4,5.6 pad.2@-10.4,6.4 pad.2@-11.2,5.6 pad.2@-11.2,6.4 R1.2 R5.2 R10.2 R11.1 U1.20 U1.31 U1.42 U1.50 U1.56 U2.6 | length 50.7
  Top Layer w0.305: P1.6@-12.7,6.35 -8.942,6.35 -8.763,6.171 -8.763,1.832 -7.873,0.942 C3.2@-7.873,0.787 -7.671,0.989 U1.50@-4.575,0.989 ; v1(-7.874,-4.953) -7.874,-5.915 -7.873,-5.916 C2.2@-7.873,-6.071 -6.553,-6.071 -5.994,-5.512 -5.994,-2.565 -5.44,-2.011 U1.56@-4.575,-2.011 ; v1(-7.849,-9.652) -7.849,-10.606 D1.A@-7.888,-10.645 -7.888,-10.8 -6.883,-11.805 -6.883,-12.043 -5.87,-13.057 FB1.2@-5.715,-13.057 ; v1(-4.572,3.227) -3.584,4.215 C1.2@-3.429,4.215 -3.274,4.215 -2.384,5.105 -0.179,5.105 0,4.927 0,3.354 -0.179,3.175 -0.432,3.175 -0.75,2.856 U1.42@-0.75,2.314 ; FB2.2@3.683,-13.056 v1(4.826,-13.056) R11.1@5.969,-13.056 ; v1(4.572,5.203) 5.56,4.215 C4.2@5.715,4.215 5.715,1.168 5.536,0.989 U1.31@4.575,0.989 ; U1.20@4.575,-4.511 5.929,-4.511 6.528,-3.912 U2.6@7.587,-3.912 v1(8.509,-3.912) ; R10.2@9.78,2.184 9.78,6.755 R1.2@9.781,6.756
  other v1: 9.779,3.327 9.779,5.613
VCC_5V: P1.4 pad.2@0,8 pad.2@0,8.8 pad.2@0,9.6 pad.2@0,10.4 pad.2@0,11.2 pad.2@0,12 pad.2@0,12.8 pad.2@0.8,9.6 pad.2@0.8,10.4 pad.2@0.8,11.2 pad.2@0.8,12 pad.2@0.8,12.8 pad.2@-0.8,8 pad.2@-0.8,8.8 pad.2@-0.8,9.6 pad.2@-0.8,10.4 pad.2@-0.8,11.2 U3.A4 U3.A9 U3.B4 U3.B9 | length 29.4
  Top Layer w0.305: v1(-11.1,7.518) -1.829,7.518 -1.25,8.097 U3.A9@-1.25,9.918 U3.A9@-1.25,9.918 -1.251,11.419 U3.B4@-1.252,11.42 -1.252,12.87 -0.889,13.233 0.914,13.233 1.248,12.9 U3.B9@1.248,11.42 1.249,11.419 U3.A4@1.25,9.918 U3.A4@1.25,9.918 1.25,8.176 1.3,8.126 v1(1.3,8.1)
  PWR w0.762: P1.4@-12.7,1.27 -11.1,2.87 v1(-11.1,7.518)
  other v1: -1.183,13.198 1.3,13.2
pads on no net: U1.21 U1.22 U1.23 U1.24 U1.26 U1.27 U1.28 U1.29 U1.30 U1.32 U1.33 U1.34 U1.36 U1.40 U1.41 U1.43 U1.44 U1.45 U1.46 U1.48 U1.52 U1.53 U1.54 U1.55 U1.57 U1.58 U1.59 U1.60 U3. U3.A8 U3.B8
copper on no net:
  other v1: 18.288,-0.483

## Polygon pours and split planes (outlines as drawn)
GND on GND "GND_L02_P000" (solid, pour order 0): -14,-14 -14,14 14,14 14,-14
VCC_3V3 on PWR "VCC_3V3_L03_P001" (solid, pour order 1): -14,-14 -14,14 14,14 14,-14
GND on Bottom Layer "GND_L04_P003" (solid, pour order 3): -14,-14 -14,14 14,14 14,-14
VCC_5V on Bottom Layer "VCC_5V_L04_P002" (solid, pour order 2): -1.183,13.204 -1.179,13.2 1.3,13.2 1.3,7.8 -1.2,7.8

## Keep-outs
Keep-Out Layer:
  the board outline again, w0.254

## Other copper
Bottom Layer:
  rectangle net VCC_3V3: 8.5,5.9 13.6,7.5
  rectangle net VCC_3V3: -13.5,5.4 -8.5,6.7
  rectangle net JTAG_TCK: 10.1,-4.4 13.6,-2.9
  rectangle net JTAG_TDI: 10.1,-2.6 13.6,-0.5
  rectangle net JTAG_TDO: 9.3,0.4 13.6,2.1
  rectangle net JTAG_TMS: 9.3,3.7 13.6,5.1
  rectangle net JTAG_RXD: -13.5,-1.9 -9.269,-0.507
  rectangle net JTAG_TXD: -13.5,-4.3 -9.2,-2.9
  rectangle net VCC_1V8: -13.5,-6.6 -9.2,-5.3

## Silkscreen, mask and mechanical layers (free items; w line width, h text height)
Top Overlay:
  text "JTAG" at -13.046,10.154 h1.52